# EAGLE board Shift register shematic (EAGLE 7.6.0)
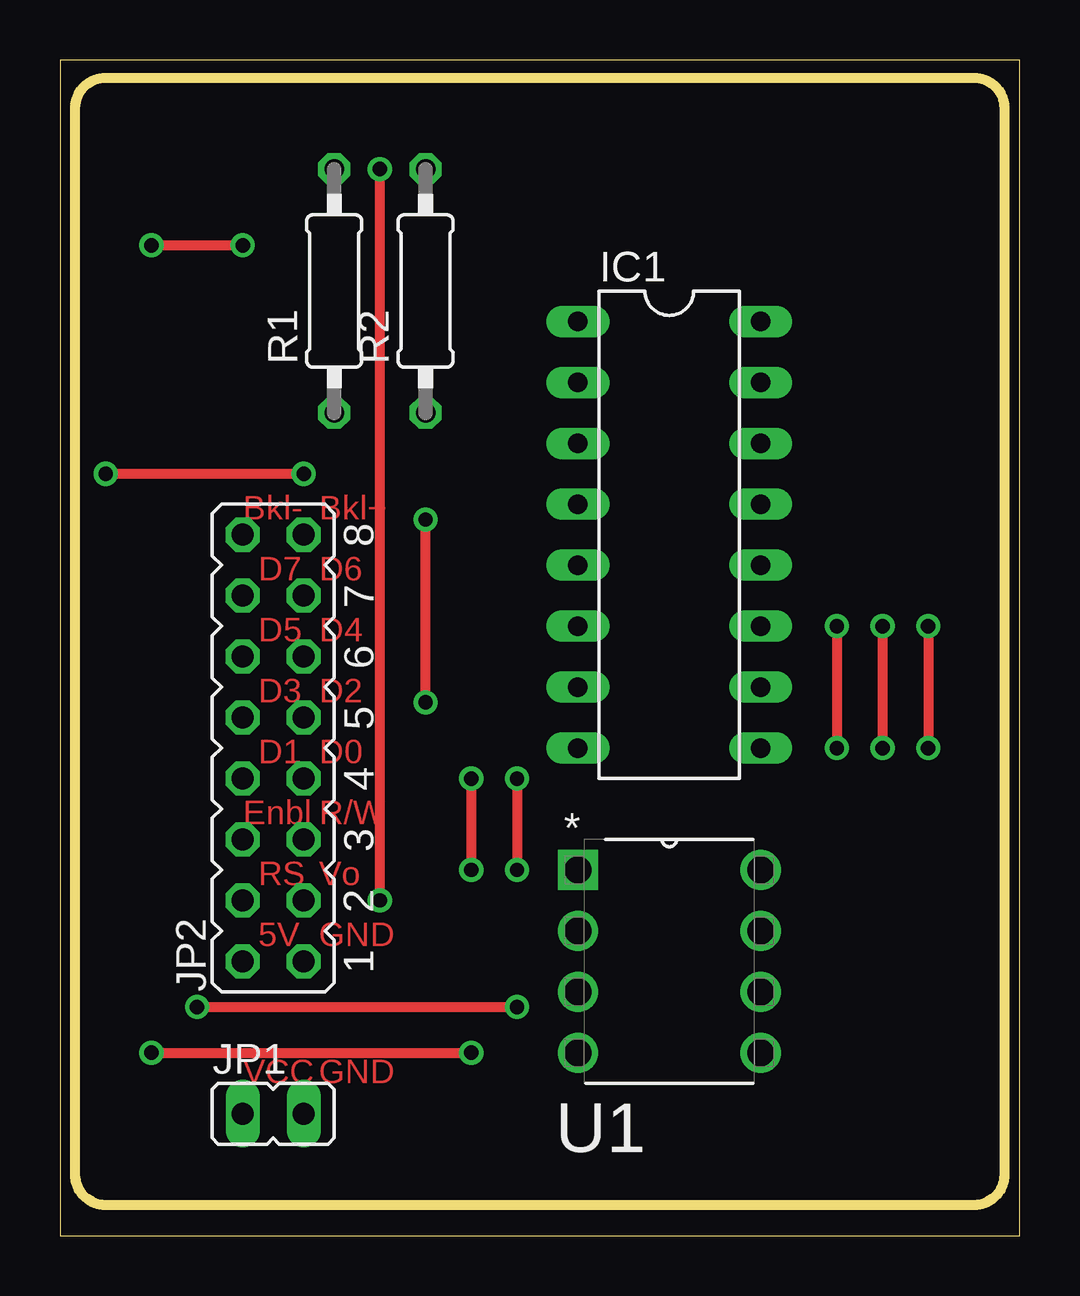
[diagram p0: board, top side]
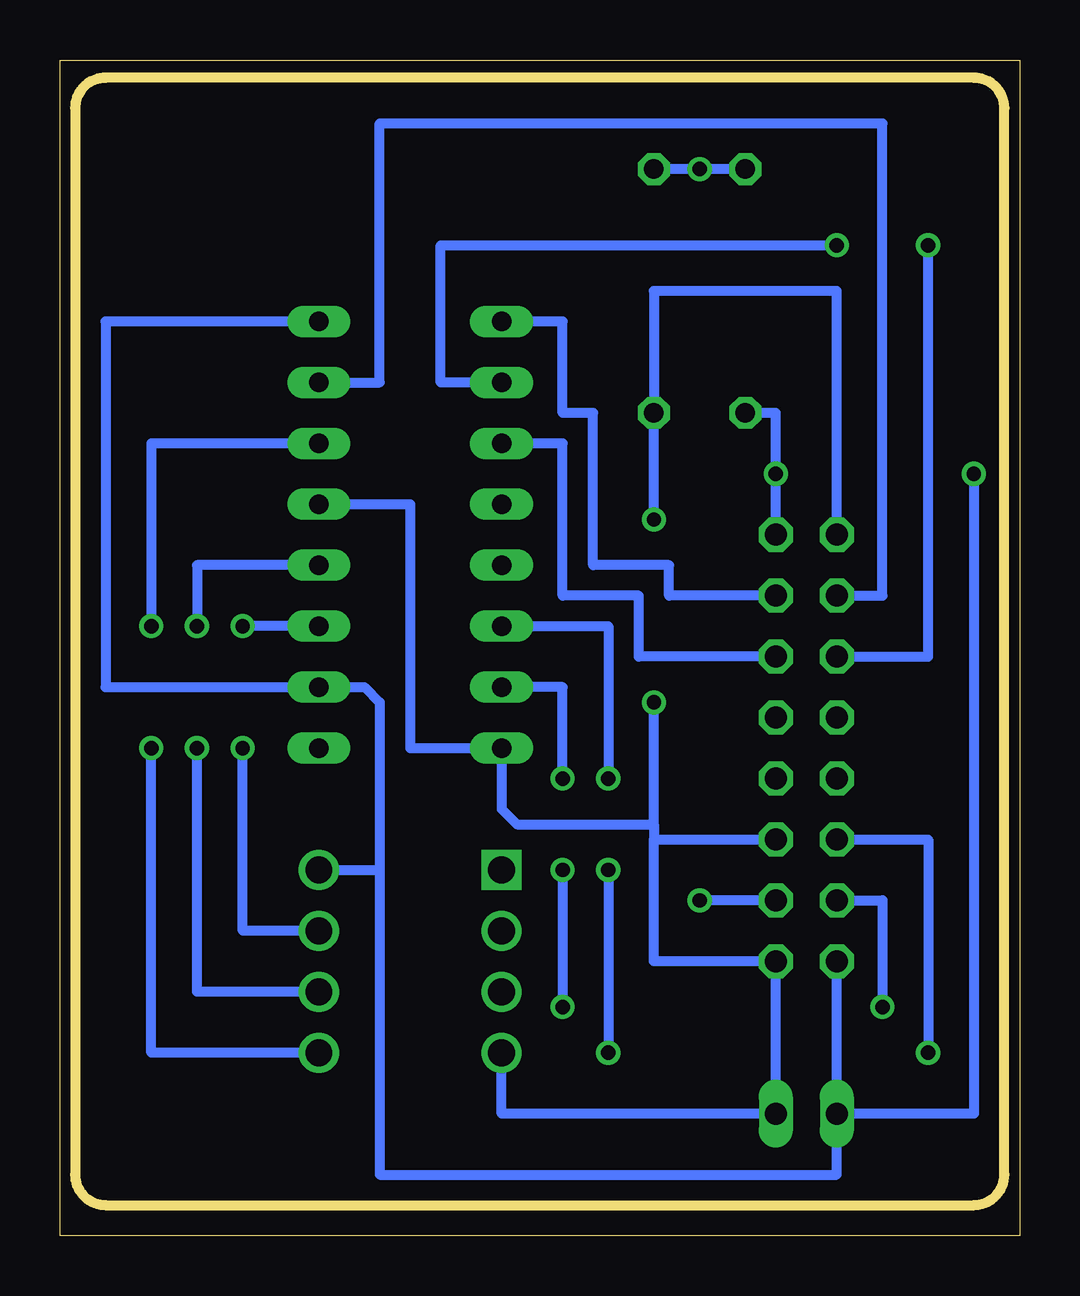
[diagram p1: board, bottom side, seen from below]

Size 40 x 49 mm. Coordinates in mm from the lower left corner, seen from the top.
Outline: 0,0 40,0 40,49 0,49 0,0
Copper layers (1*16): Top 0.035mm / dielectric 1.5mm / Bottom 0.035mm
Design rules "default *": minimum track width 10mil, minimum drill 24mil, track to track 0.79248125mm, track to pad 0.79248125mm, pad to pad 0.79248125mm, via to via 0.79248125mm, smd to smd 0.79248125mm, copper to edge 40mil, drill to drill 8mil, minimum pad ring 10mil, minimum via ring 8mil, stop-mask expansion 4mil, vias tented up to drill 0mil, thermal gap 10mil
Net classes: 0 default: width 0.203 mm
Milling: 8 lines

## Footprints (pad centres in the part's own frame; a part is rotated, then mirrored left to right if it is on the bottom)
DIL16 = drill 0.813 long: 1 -8.89,-3.81; 2 -6.35,-3.81; 3 -3.81,-3.81; 4 -1.27,-3.81; 5 1.27,-3.81; 6 3.81,-3.81; 7 6.35,-3.81; 8 8.89,-3.81; 9 8.89,3.81; 10 6.35,3.81; 11 3.81,3.81; 12 1.27,3.81; 13 -1.27,3.81; 14 -3.81,3.81; 15 -6.35,3.81; 16 -8.89,3.81
JP1 = drill 0.914 long: 1 0,-1.27; 2 0,1.27
JP8Q = drill 0.914 octagon: 1 -8.89,-1.27; 2 -8.89,1.27; 3 -6.35,-1.27; 4 -6.35,1.27; 5 -3.81,-1.27; 6 -3.81,1.27; 7 -1.27,-1.27; 8 -1.27,1.27; 9 1.27,-1.27; 10 1.27,1.27; 11 3.81,-1.27; 12 3.81,1.27; 13 6.35,-1.27; 14 6.35,1.27; 15 8.89,-1.27; 16 8.89,1.27
0207/10 = drill 0.813 octagon: 1 -5.08,0; 2 5.08,0
DIP254P762X533-8 = drill 1.118 square: 1 -7.62,7.62 | drill 1.118: 2 -7.62,5.08; 3 -7.62,2.54; 4 -7.62,0; 5 0,0; 6 0,2.54; 7 0,5.08; 8 0,7.62

## Placement (x,y rotation side)
IC1  74HC595N  [DIL16]  25.4,29.21 270 top
JP1  [JP1]  8.89,5.08 270 top
JP2  [JP8Q]  8.89,20.32 90 top
R1  [0207/10]  11.43,39.37 90 top
R2  [0207/10]  15.24,39.37 90 top
U1  ATTINY85-20PU  [DIP254P762X533-8]  29.21,7.62 0 top

## Library data of the parts
IC1 = 74xx-eu
JP1 JP2 = jumper
R1 R2 = resistor
U1 = Atmel_By_element14_Batch_1-00; MPN: ATTINY85-20PU; OC_FARNELL: 1455162; OC_NEWARK: 58M3796; PACKAGE: PDIP-8; SUPPLIER: Atmel

## Nets
GND: IC1.8 IC1.13 JP1.2 JP2.1 JP2.5 JP2.16 R2.1 U1.4
N$1: IC1.15 JP2.14
N$2: IC1.1 JP2.13
N$3: IC1.2 JP2.12
N$4: IC1.3 JP2.11
N$5: IC1.6 JP2.6
N$6: IC1.7 JP2.4
N$7: IC1.14 U1.5
N$8: IC1.12 U1.6
N$9: IC1.11 U1.7
N$10: JP2.3 R1.2 R2.2
VCC: IC1.10 IC1.16 JP1.1 JP2.2 JP2.15 R1.1 U1.8

## Tracks (layer width: path | path; a pad name or v marks a point on that pad's centre or on a via)
GND  (via drill 0.6)
  Top 0.406: v15.24,22.23 v15.24,29.84
  Bottom 0.406: 15.24,16.51 JP2.5 | IC1.13 25.4,30.48 25.4,20.32 IC1.8 21.59,17.78 20.95,17.14 15.24,17.14 | 15.24,16.51 15.24,11.43 JP2.1 JP1.2 21.59,5.08 U1.4 | JP2.16 7.62,39.37 15.24,39.37 R2.1 v15.24,29.84 | 15.24,17.14 15.24,16.51 | 15.24,17.14 v15.24,22.23
N$1
  Bottom 0.406: IC1.15 26.67,35.56 26.67,46.35 5.71,46.35 5.71,26.67 JP2.14
N$2
  Bottom 0.406: JP2.13 14.61,26.67 14.61,27.94 17.78,27.94 17.78,34.29 19.05,34.29 19.05,38.1 IC1.1
N$3  (via drill 0.6)
  Top 0.406: v3.81,41.27 v7.62,41.27
  Bottom 0.406: JP2.12 3.81,24.13 v3.81,41.27 | IC1.2 24.13,35.56 24.13,41.27 v7.62,41.27
N$4
  Bottom 0.406: JP2.11 15.88,24.13 15.88,26.67 19.05,26.67 19.05,33.02 IC1.3
N$5  (via drill 0.6)
  Top 0.406: v3.81,7.62 v17.14,7.62 | v17.14,19.05 v17.14,15.24
  Bottom 0.406: JP2.6 3.81,16.51 v3.81,7.62 | IC1.6 17.14,25.4 v17.14,19.05 | v17.14,15.24 v17.14,7.62
N$6  (via drill 0.6)
  Top 0.406: v19.05,19.05 v19.05,15.24 | v5.71,9.53 v19.05,9.53
  Bottom 0.406: v19.05,15.24 v19.05,9.53 | JP2.4 5.71,13.97 v5.71,9.53 | v19.05,19.05 19.05,22.86 IC1.7
N$7  (via drill 0.6)
  Top 0.406: v36.2,25.4 v36.2,20.32
  Bottom 0.406: IC1.14 36.2,33.02 v36.2,25.4 | U1.5 36.2,7.62 v36.2,20.32
N$8  (via drill 0.6)
  Top 0.406: v34.29,25.4 v34.29,20.32
  Bottom 0.406: U1.6 34.29,10.16 v34.29,20.32 | IC1.12 34.29,27.94 v34.29,25.4
N$9  (via drill 0.6)
  Top 0.406: v32.38,25.4 v32.38,20.32
  Bottom 0.406: U1.7 32.38,12.7 v32.38,20.32 | IC1.11 v32.38,25.4
N$10  (via drill 0.6)
  Top 0.406: v13.34,13.97 v13.34,44.45
  Bottom 0.406: R1.2 v13.34,44.45 R2.2 | JP2.3 v13.34,13.97
VCC  (via drill 0.6)
  Top 0.406: v10.16,31.75 v1.91,31.75
  Bottom 0.406: JP1.1 JP2.2 | U1.8 26.67,15.24 | 26.67,15.24 26.67,2.54 7.62,2.54 JP1.1 | IC1.16 38.1,38.1 38.1,22.86 IC1.10 27.3,22.86 26.67,22.23 26.67,15.24 | R1.1 10.16,34.29 v10.16,31.75 JP2.15 | v1.91,31.75 1.91,5.08 JP1.1

## Text on the board
Top: Bkl- | Bkl+ | D7 | D6 | D5 | D4 | D3 | D2 | D1 | D0 | Enbl | R/W | RS | Vo | 5V | GND | VCC | GND